# Altium PCB PCB1.PcbDoc
Units mil, origin at the board's own origin, x right, y up, seen from the top; angles counter-clockwise.
Board outline 3165 x 430 mil, 2 copper layers (Top Layer, Bottom Layer), stack 20.4 mil thick; 1 components, 3 nets, 11 pads, 0 vias.
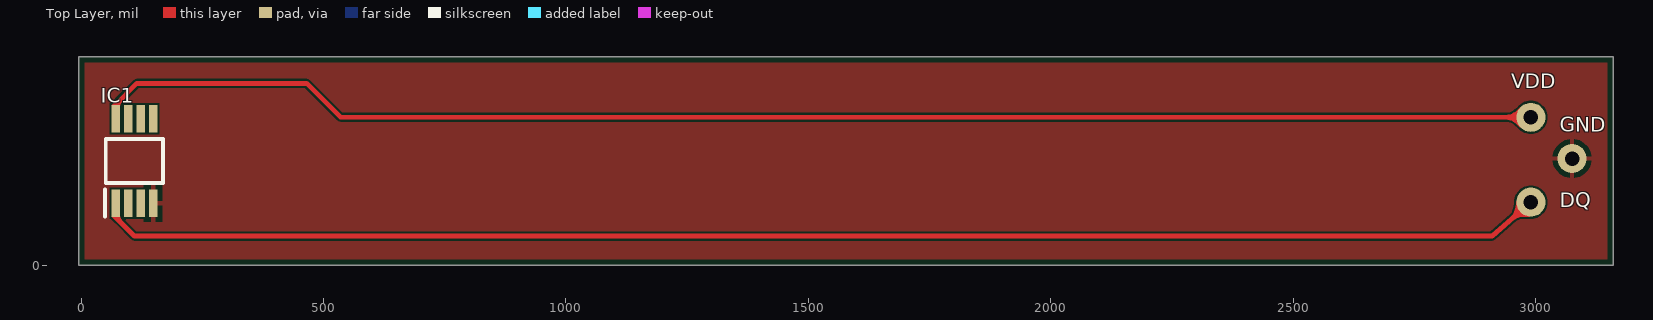
[diagram p0: Top Layer view]
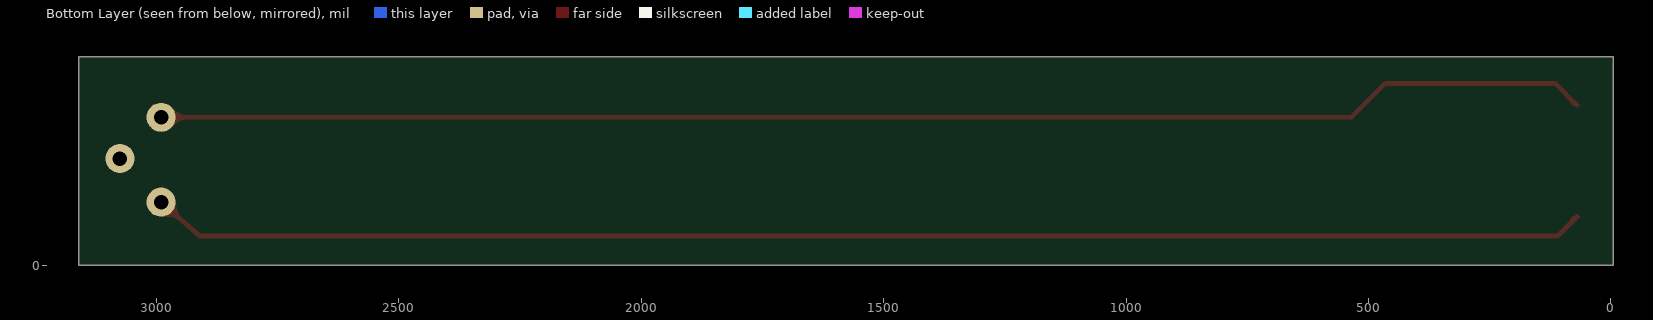
[diagram p1: Bottom Layer view, seen from below]

## Layer stack, top to bottom
Top Stiffener: core 4, Core-009, Dk 4.5
Top Coverlay: solder mask 0.4724, FC-001, Dk 4
Top Layer: signal copper 1.4
Adhesive 1: prepreg 2.8, PP-006, Dk 4.1
Polyimide: core 4, Core-009, Dk 4.5
Adhesive 2: prepreg 2.8, PP-006, Dk 4.1
Bottom Layer: signal copper 1.4
Bottom Coverlay: solder mask 0.4724, FC-001, Dk 4
Stiffener : core 4, Core-009, Dk 4.5

## Board outline
-5,0 3160,0 3160,430 -5,430

## Design rules (kind name [scope] priority, off if disabled: settings)
BoardOutlineClearance [All] p1: gap=11.81 ignorepadtopadclearanceinfootprint=FALSE
Clearance [All] p1: gap=4 ignorepadtopadclearanceinfootprint=FALSE
HoleSize [All] p1: absolutevalues=TRUE maxlimit=196.85 minlimit=5.91 maxpercent=80.000 minpercent=20.000
HoleToHoleClearance [All] p1: gap=7.87 allowstackedmicrovias=TRUE
MinimumAnnularRing [All] p1: minimumring=6
PolygonConnect [All] p1: connectstyle=Relief reliefconductorwidth=10 reliefentries=4 polygonreliefangle="90 Angle" airgapwidth=10
RoutingVias [All] p1: holewidth=28 width=50 viastyle="Through Hole" minholewidth=11.81 minwidth=21.65 maxholewidth=28 maxwidth=50
SolderMaskExpansion [All] p1: expansion=3.94 istentingtop=FALSE
Width [All] p1: maxlimit=40 minlimit=4 preferedwidth=4.5
28 further rules are at their usual default settings.

## Components (designator, comment, footprint, x,y, rotation, side; value= is the part's Value field where it differs from the comment)
IC1 "DS18B20U+" SOP65P490X110-8N 110,215 r90 top

## Footprints (in the part's own frame and the unit in brackets; to place one, negate y for a bottom-side part, rotate by r counter-clockwise, add the part's x,y. Pads: shape width x height; smd on the part's side, far side on the other; paste and mask are expansions set on the pad)
SOP65P490X110-8N [mm]
  rect 1.425x0.45 smd: 1(-2.212,0.975) 2(-2.212,0.325) 3(-2.212,-0.325) 4(-2.212,-0.975) 5(2.212,-0.975) 6(2.212,-0.325) 7(2.212,0.325) 8(2.212,0.975)
  silkscreen extent -2.93,-1.5 1.15,1.55, body extent -2.51,-1.5 2.51,1.6, height 1.1

## Part data
IC1: "Integrated Circuit", Manufacturer_Name="Analog Devices", Mouser Part Number=700-DS18B20U, Arrow Part Number=DS18B20U+, Arrow Price/Stock=https://www.arrow.com/en/products/ds18b20u/analog-devices?utm_currency=USD&region=nac, Datasheet Link=https://datasheets.maximintegrated.com/en/ds/DS18B20.pdf, Height=1.1mm, Manufacturer_Part_Number=DS18B20U+, Mouser Price/Stock=https://www.mouser.co.uk/ProductDetail/Analog-Devices-Maxim-Integrated/DS18B20U%2b?qs=7H2Jq%252ByxpJLxAEcPXZtrFQ%3D%3D

## Free pads (board coordinates)
  round 60 hole 30: 1(2990,305) 3(3075,220) 4(2990,130)

## Nets (pads, with @x,y where several pads share a name; then routed paths per layer and width w, separated by ;. In a path a pad name is that pad's centre, name@x,y a point inside that pad or via, vN(x,y) a via of type N, cw(c..) or ccw(c..) an arc to the next point about the centre after c; other vN are vias at no path point)
DQ: IC1.1 pad.4 | length 2963.5
  Top Layer w10: IC1.1@69.54,100.46 110,60 2910,60 pad.4
GND: IC1.4 pad.3
VDD: IC1.8 pad.1 | length 2967.6
  Top Layer w10: IC1.8@70,330 115,375 465,375 535,305 pad.1
pads on no net: IC1.2 IC1.3 IC1.5 IC1.6 IC1.7

## Polygon pours and split planes (outlines as drawn)
no net on Layer0 "Default Coverlay 1 Top" (split plane): -5,0 3160,0 3160,430 -5,430
no net on Layer0 "Default Coverlay 1 Bottom" (split plane): -5,0 3160,0 3160,430 -5,430
GND on Top Layer "GND_L01_P000" (solid, pour order 0): -90,635 -40,585 -40,-385 2850,-385 3755,520

## Silkscreen, mask and mechanical layers (free items; w line width, h text height)
Top Overlay:
  text "VDD" at 2950,365 h30
  text "GND" at 3050,275 h30
  text "DQ" at 3050,120 h30